# Altium PCB ISL6236A_DEMO_V1I1.PcbDoc
Units mm, origin at the board's own origin, x right, y up, seen from the top; angles counter-clockwise.
Board outline 50 x 50 mm, 6 copper layers (L1, L2, L3, L4, L5, L6), stack 0.816 mm thick; 41 components, 26 nets, 119 pads, 102 vias.
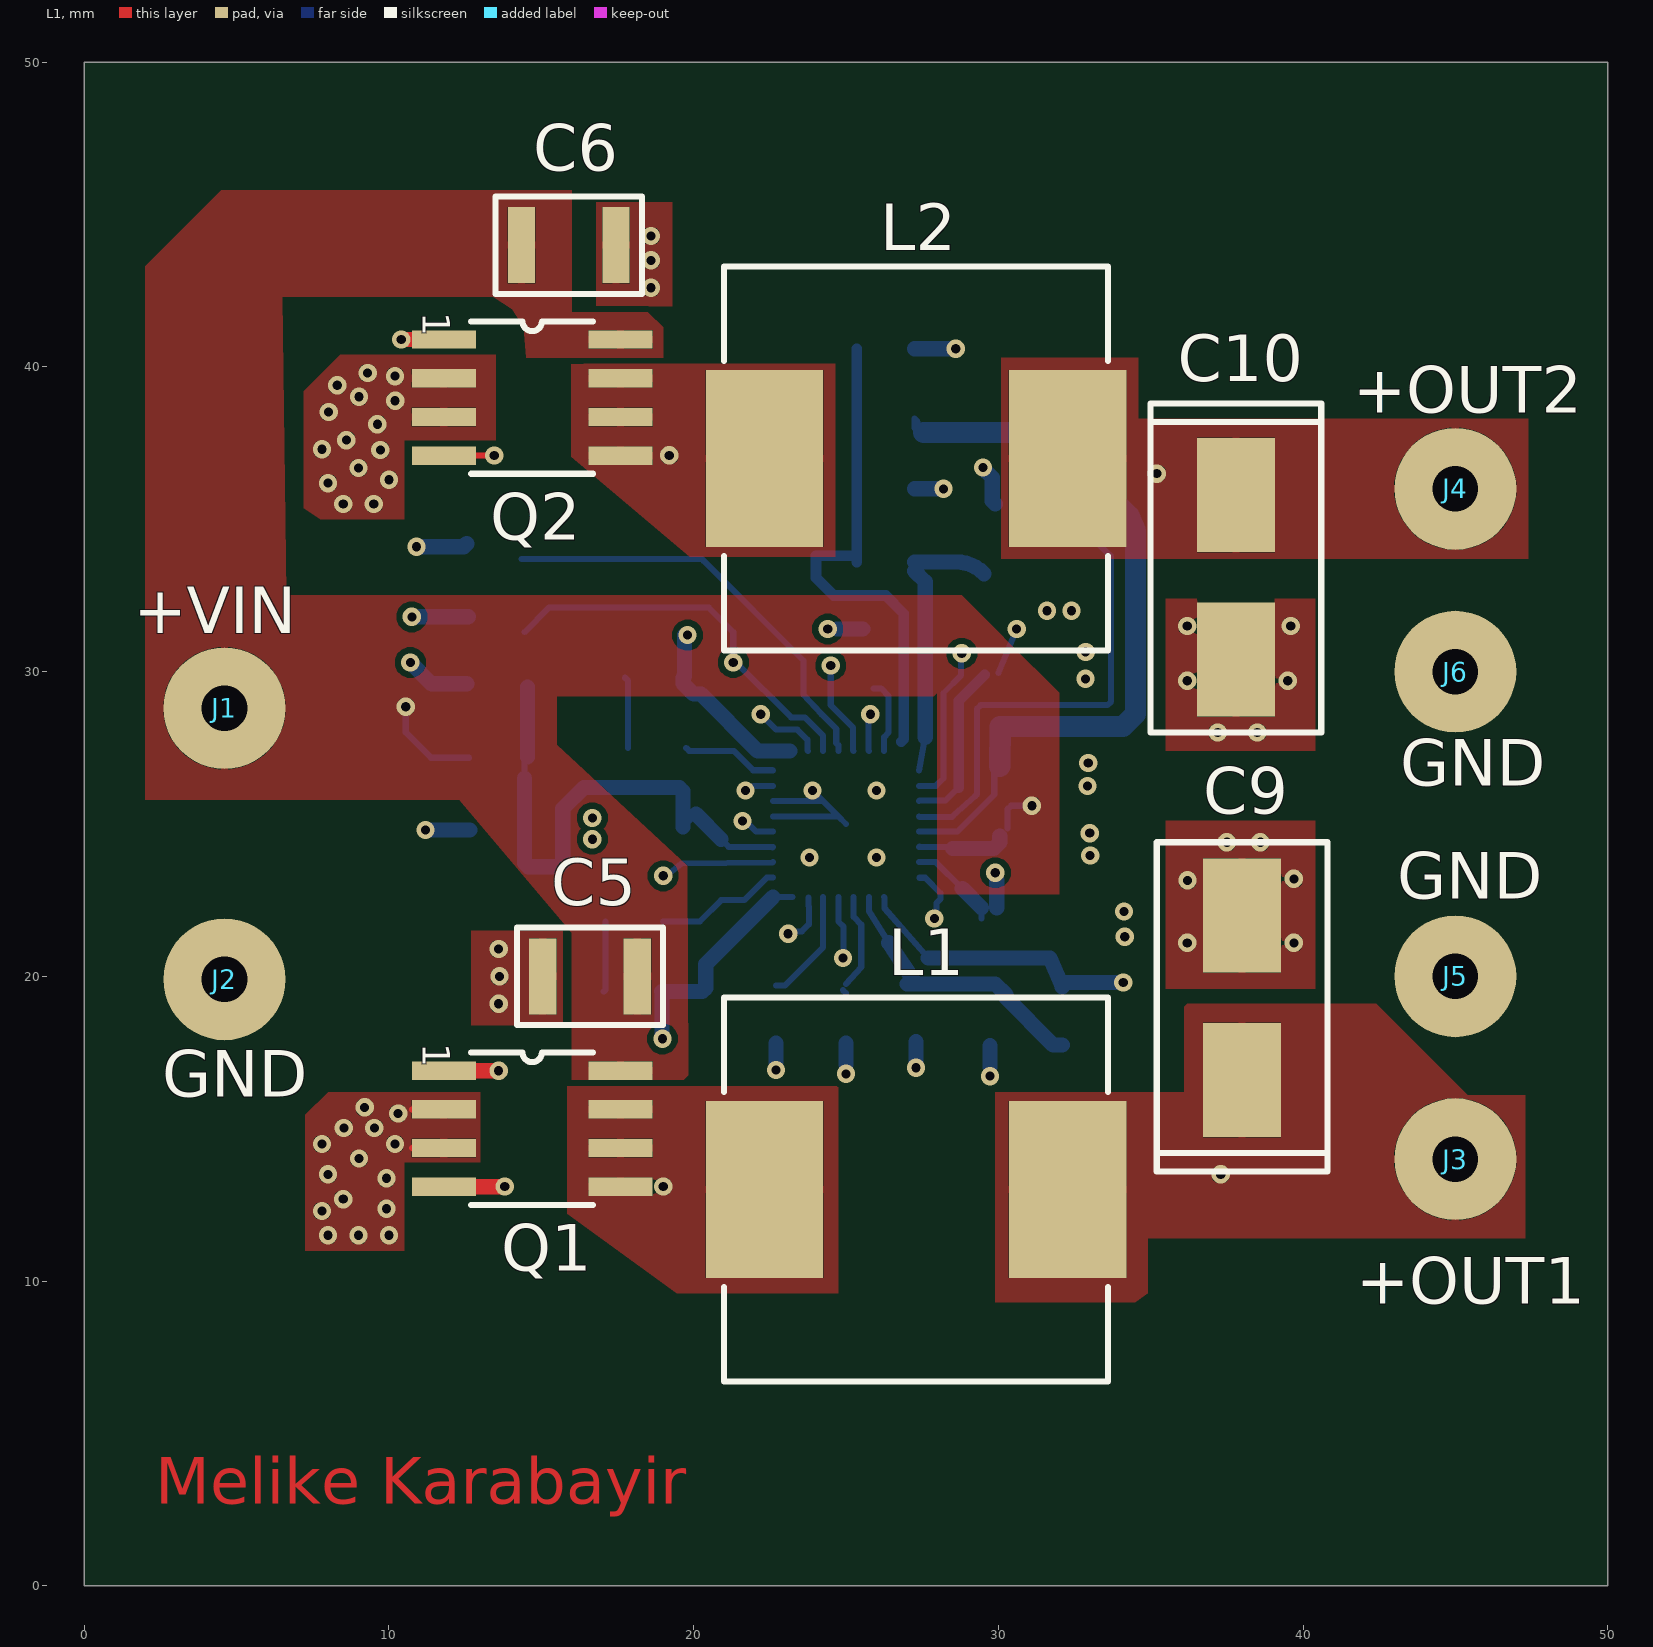
[diagram p0: L1 view]
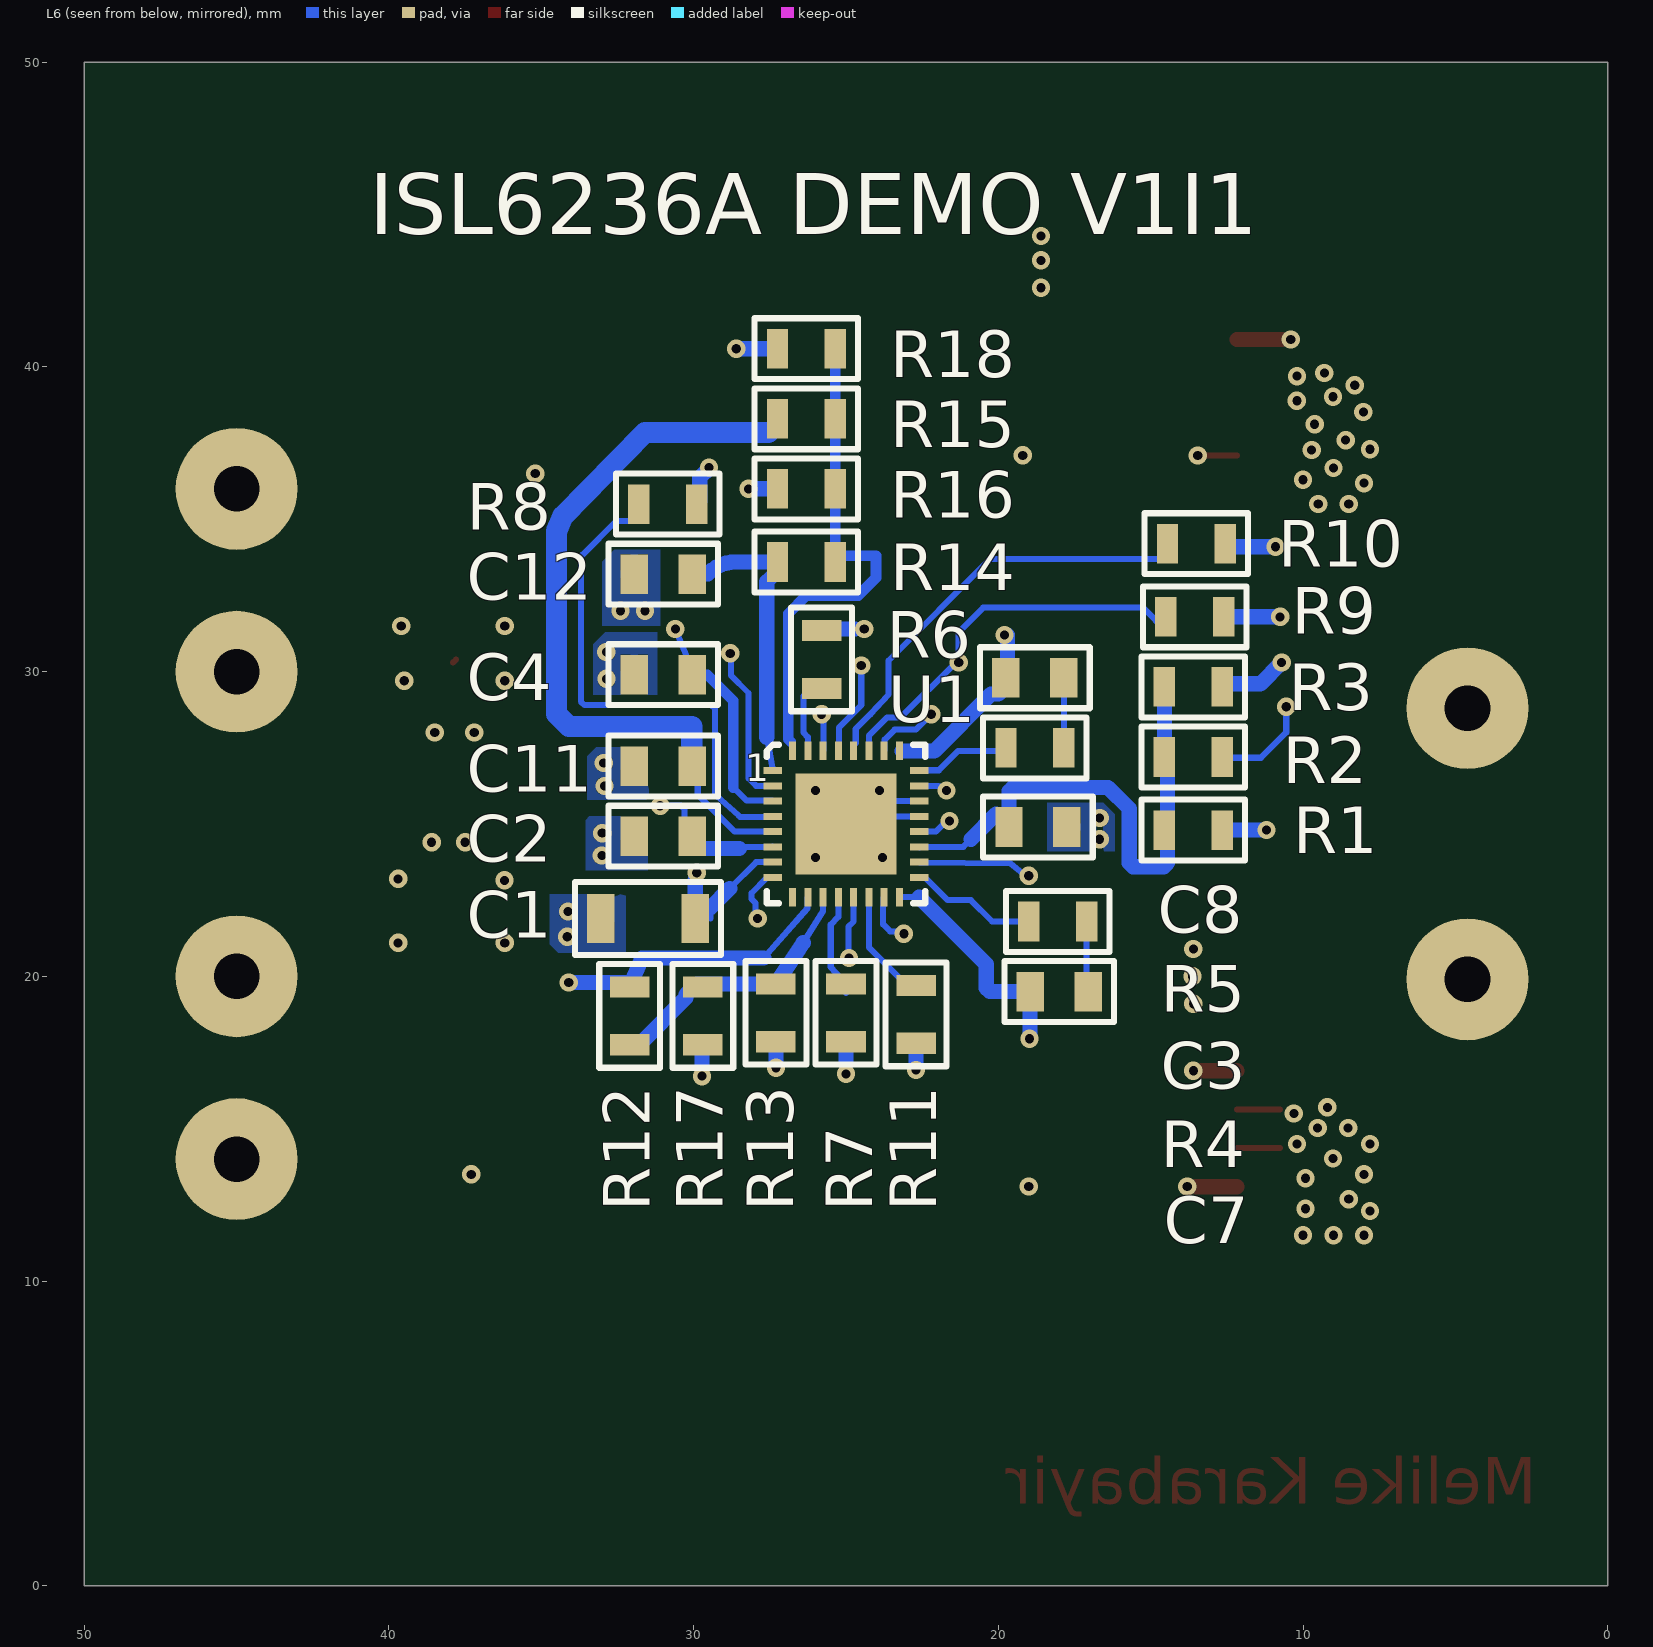
[diagram p1: L6 view, seen from below]
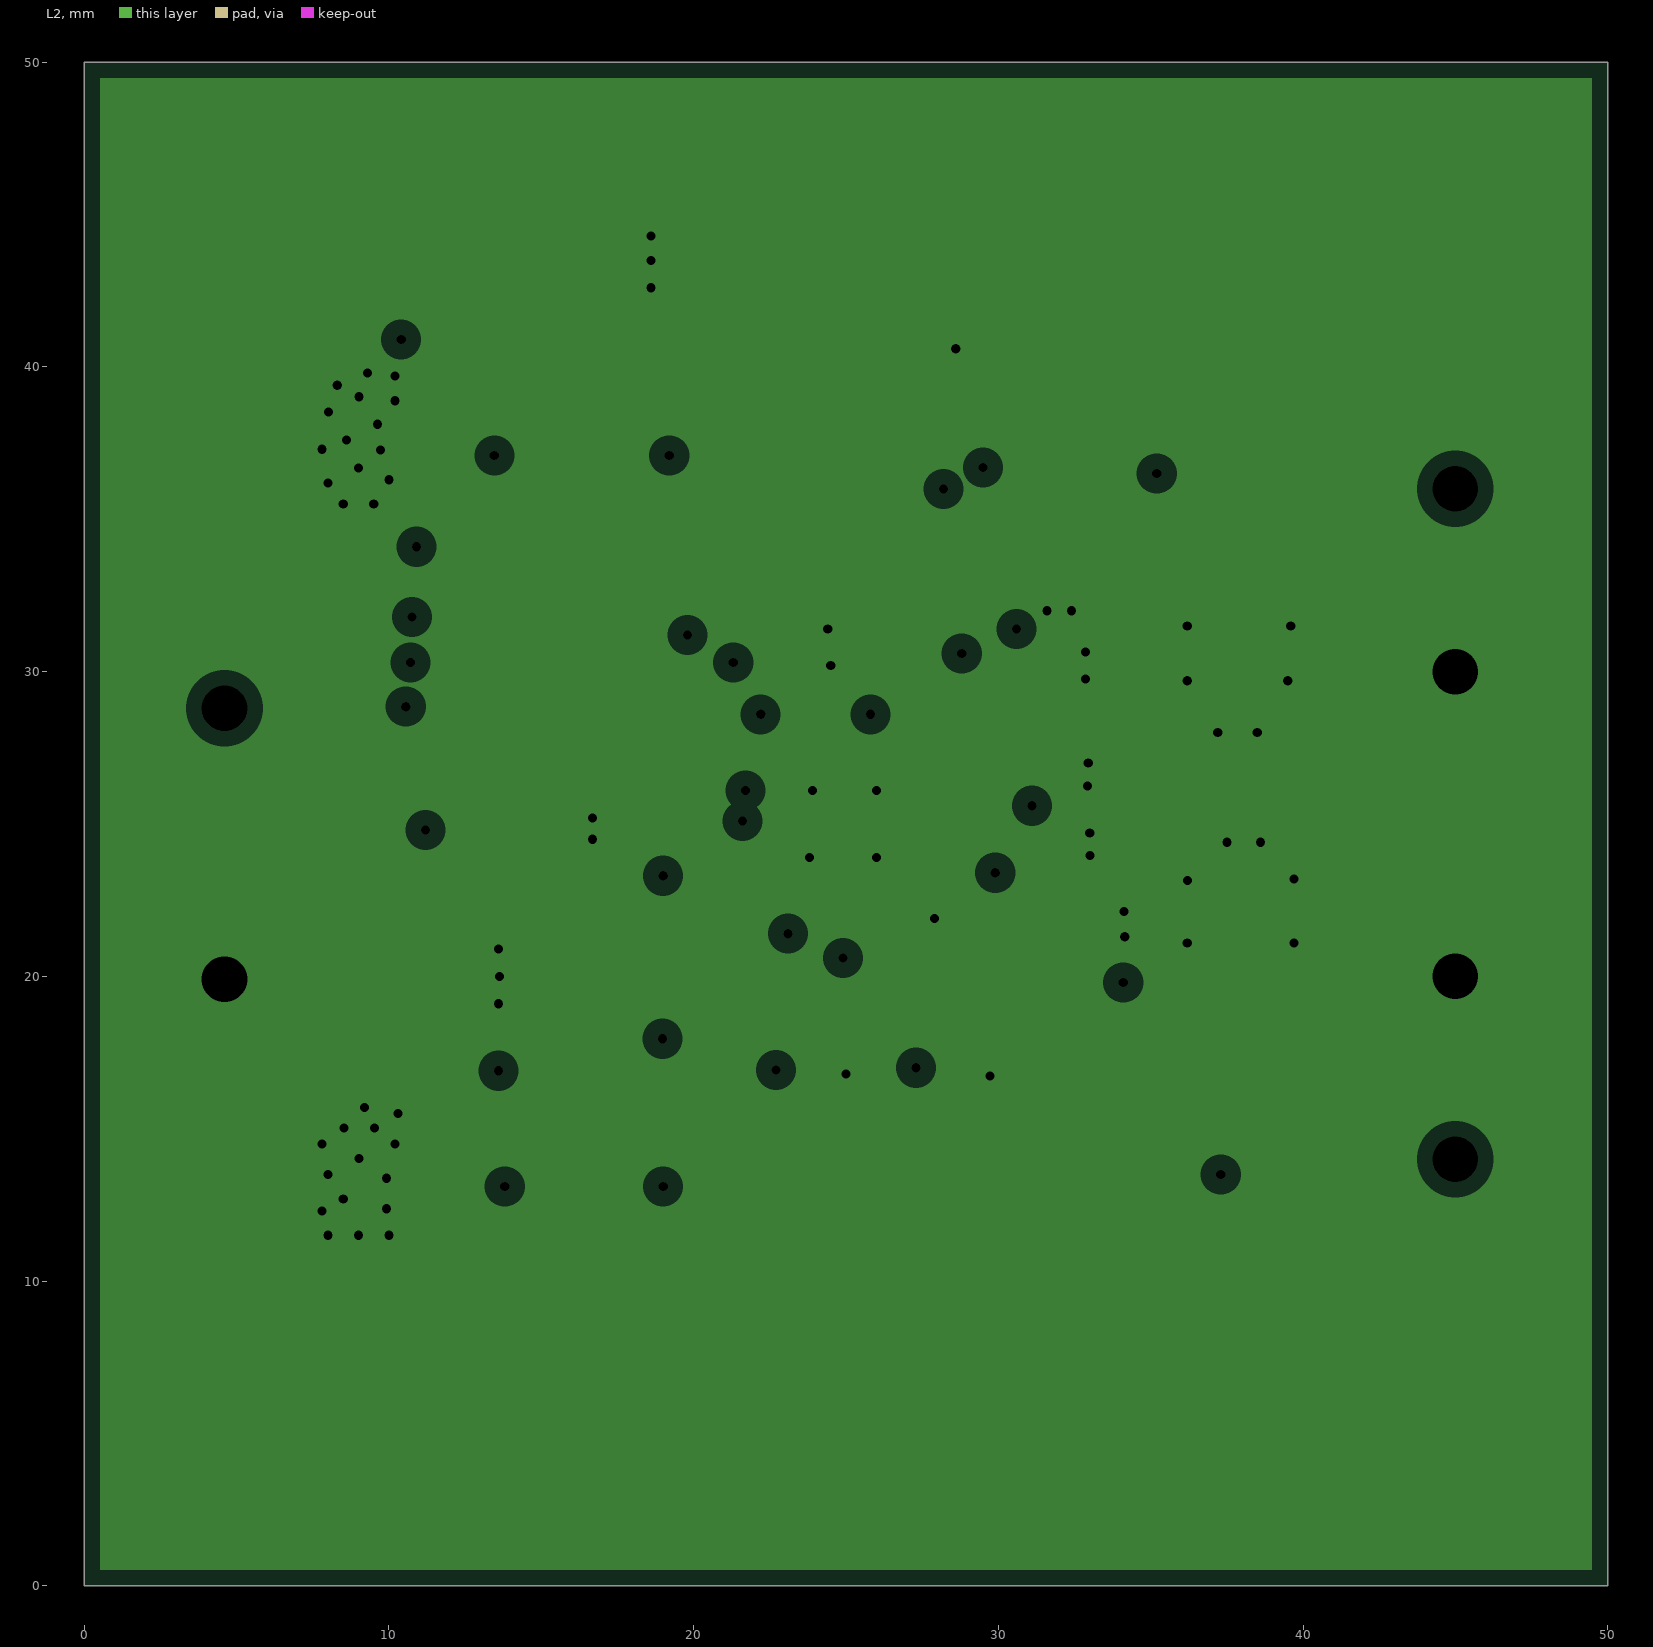
[diagram p2: L2, clearances drawn from the general rule]
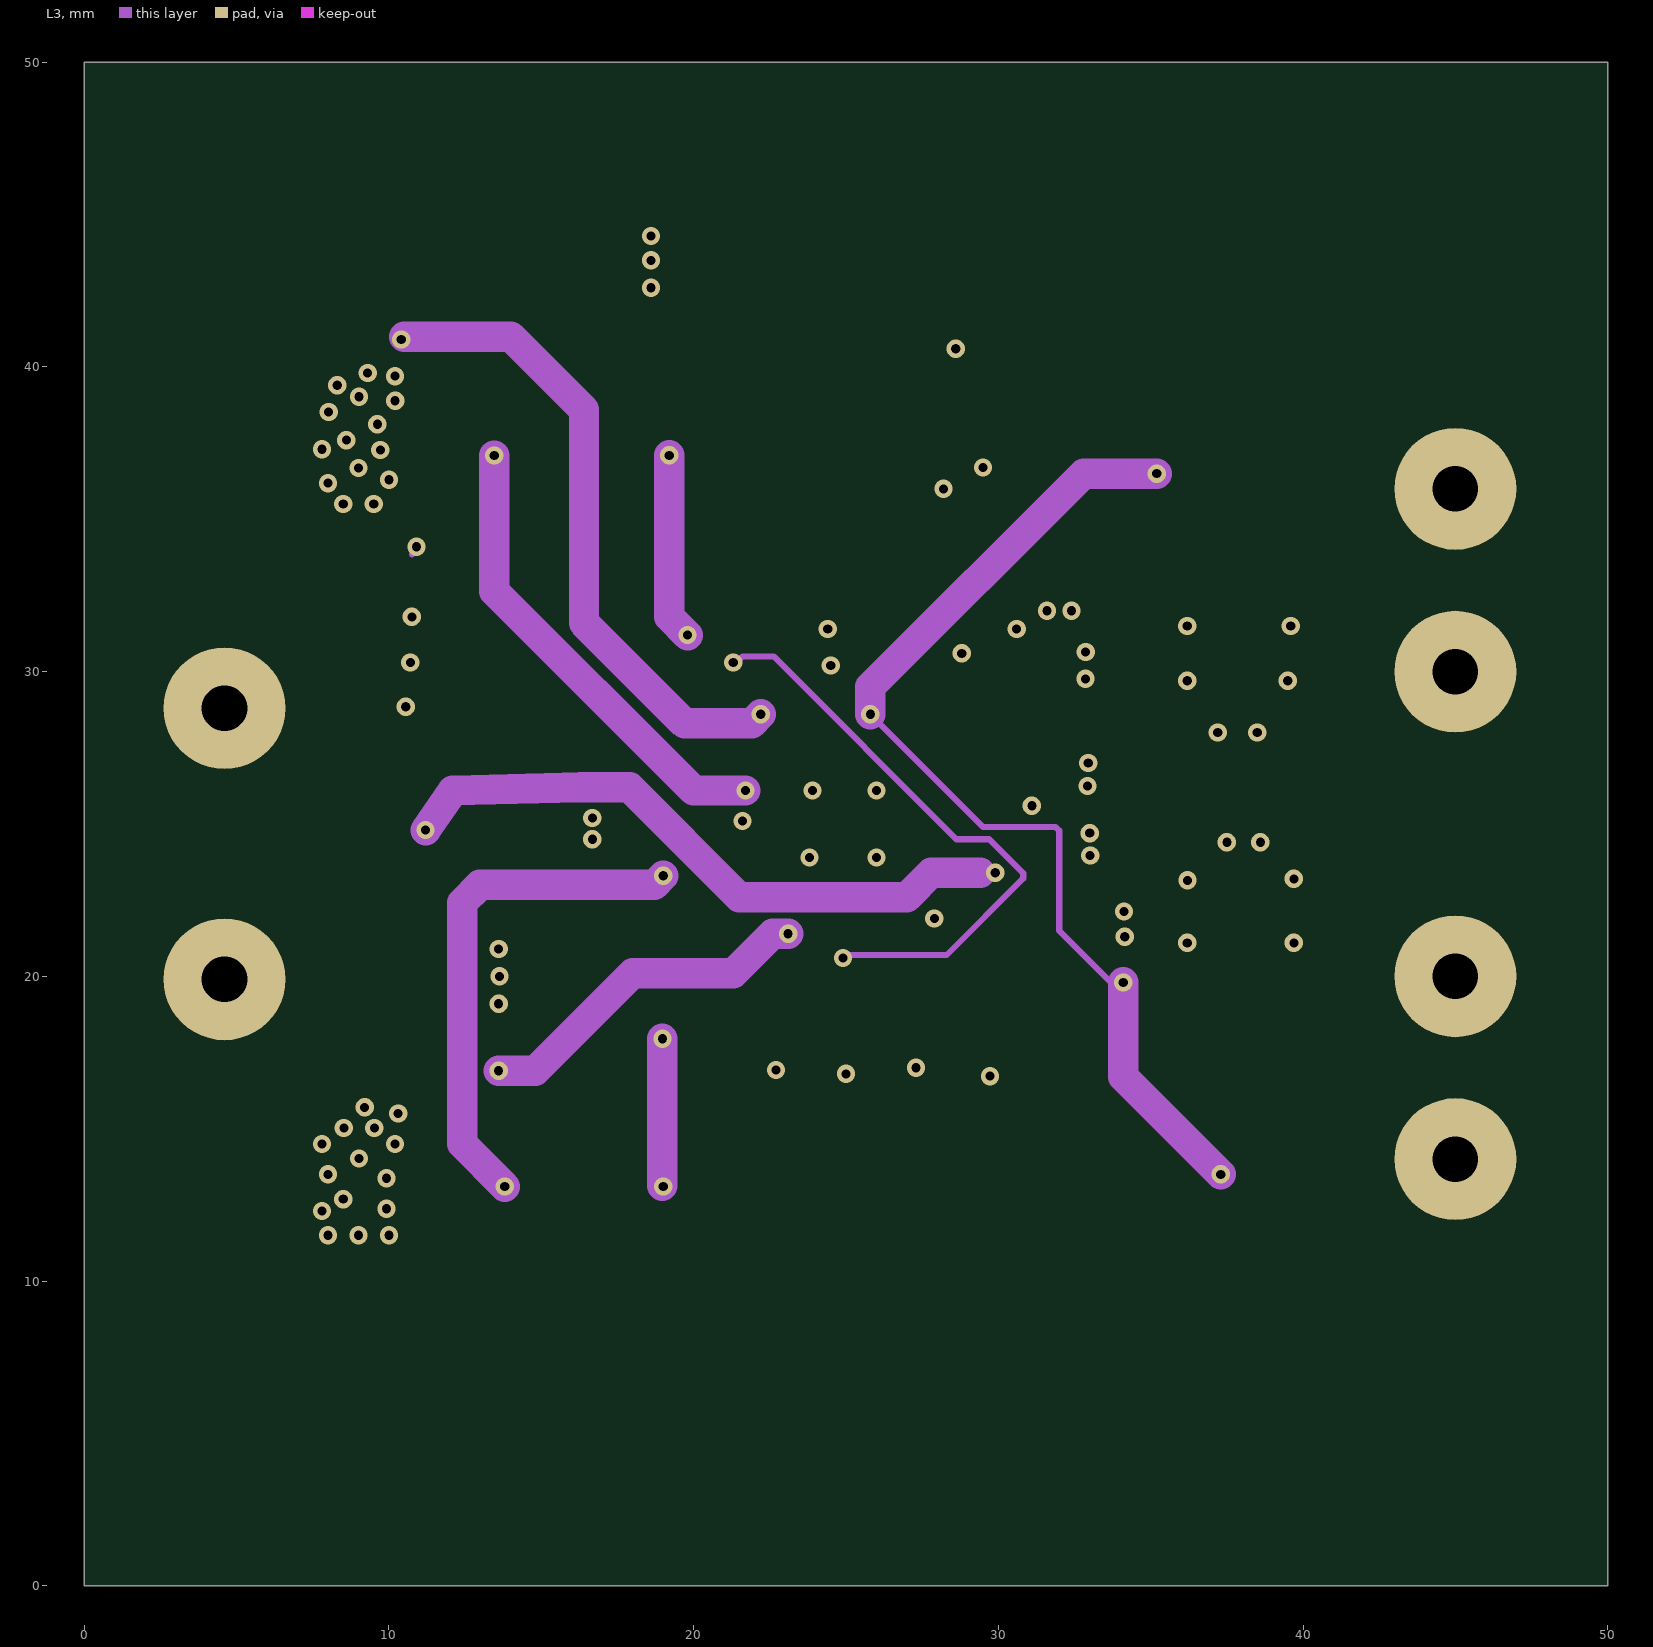
[diagram p3: L3]
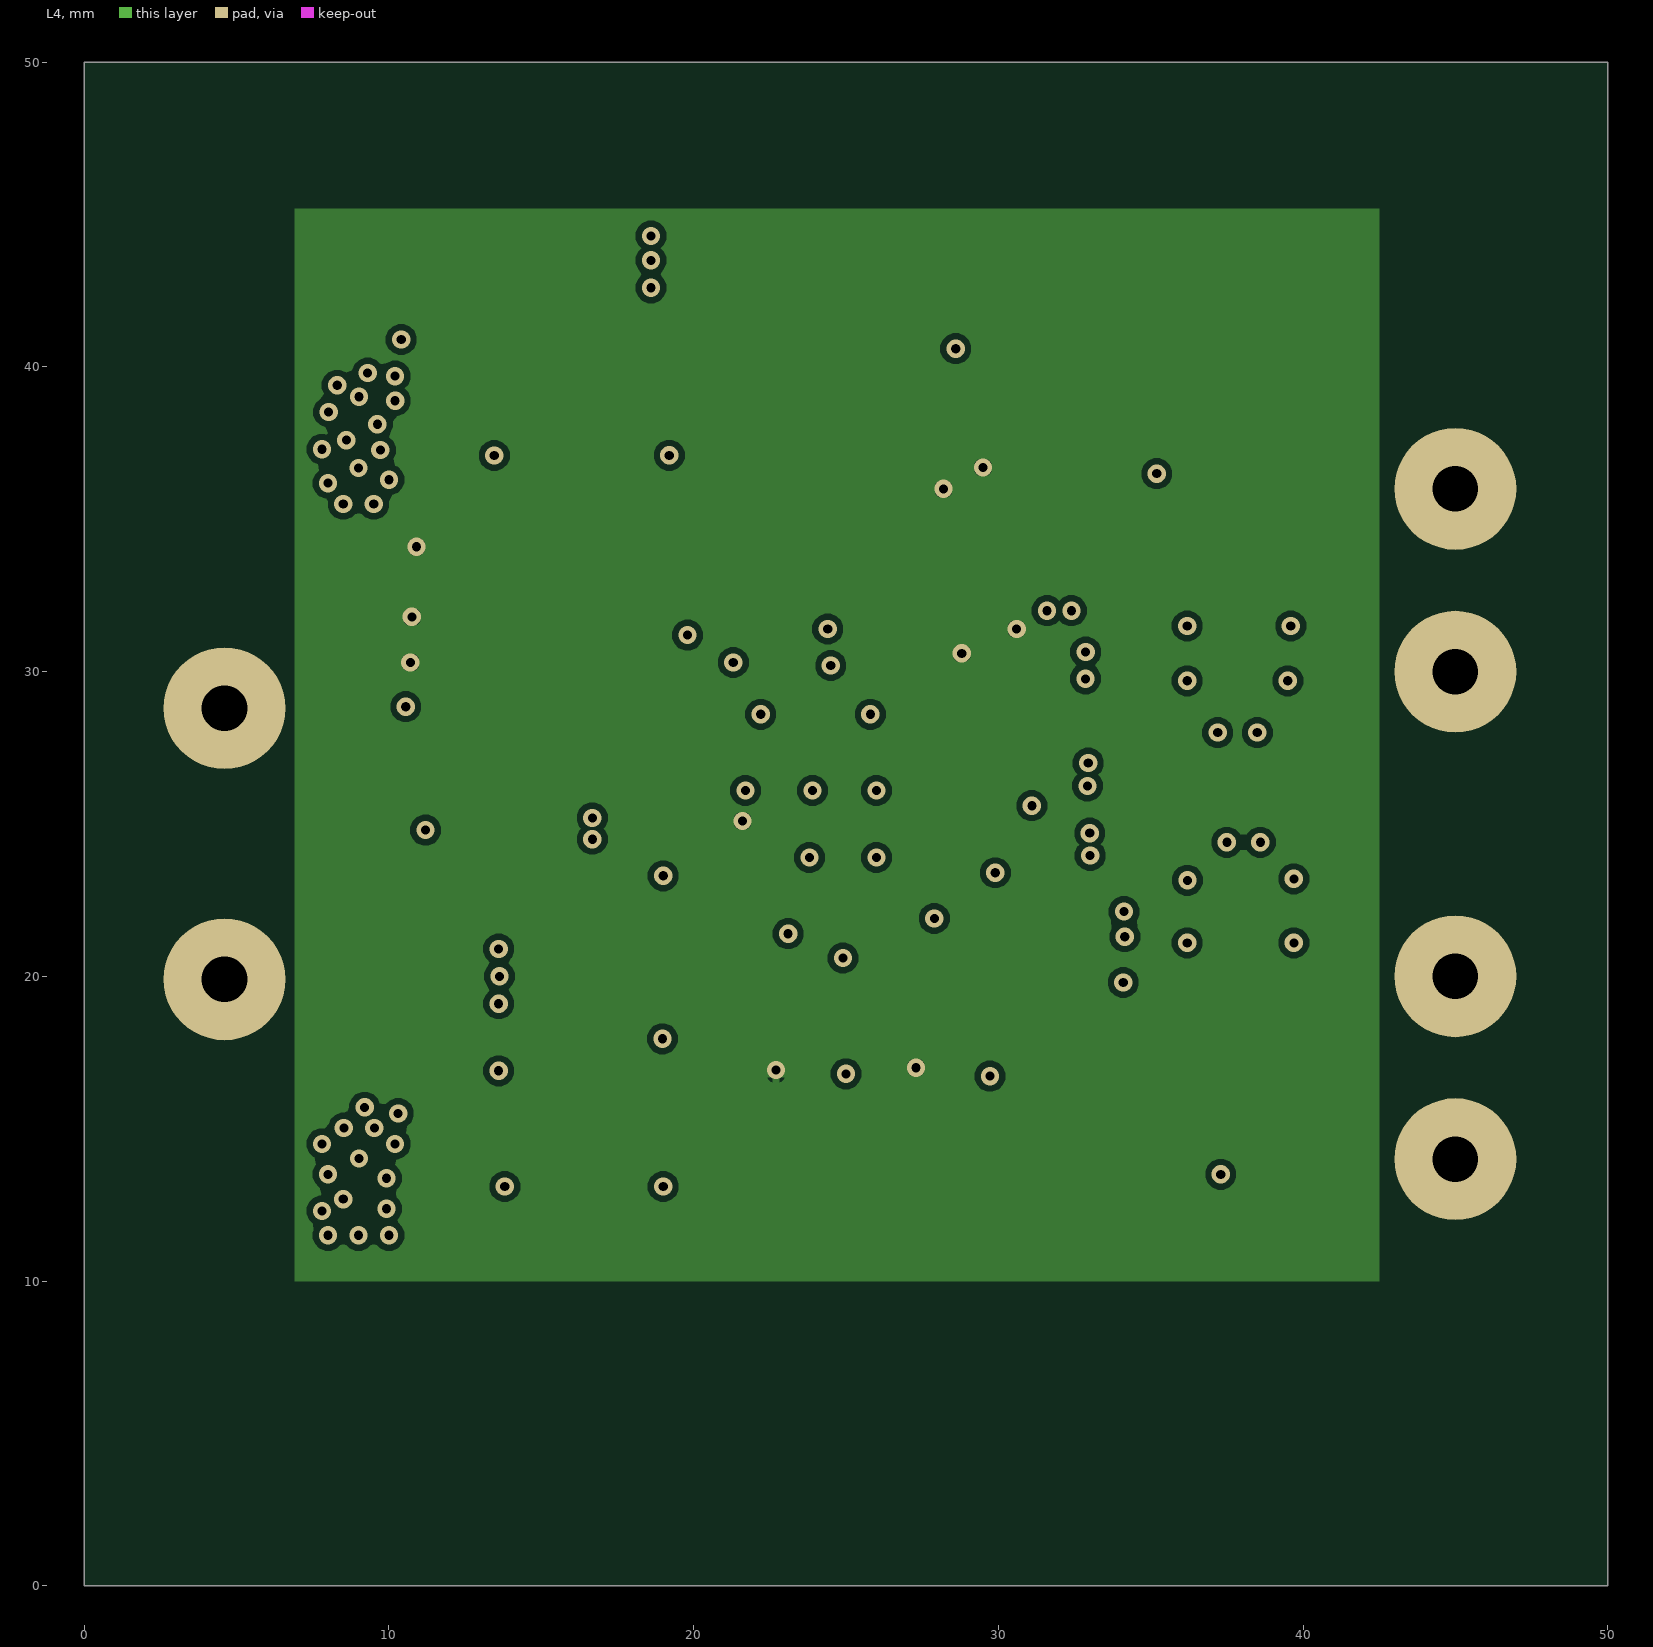
[diagram p4: L4]
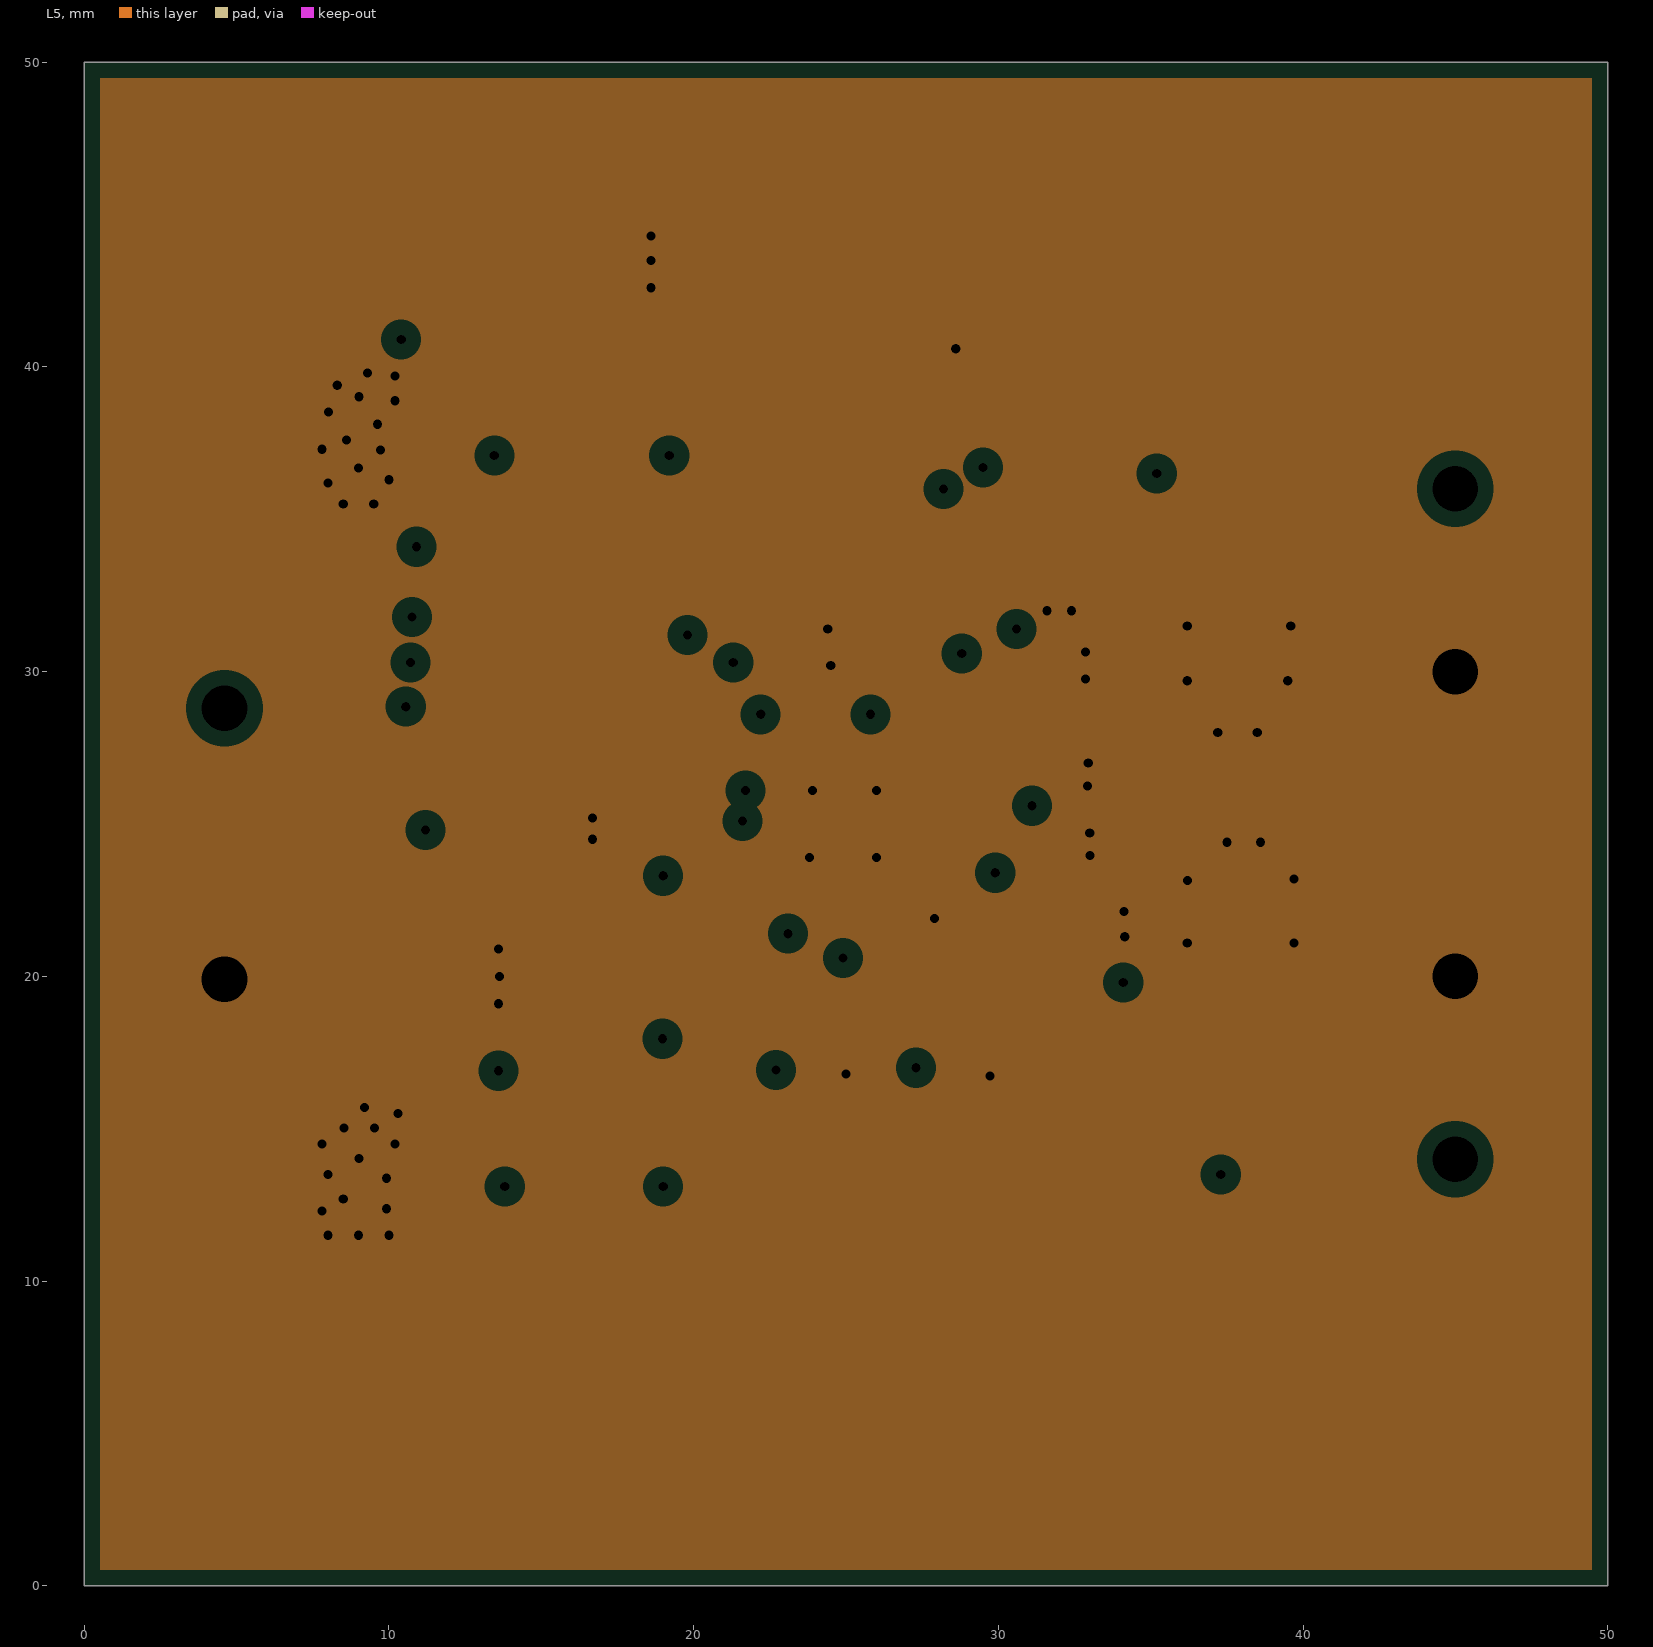
[diagram p5: L5, clearances drawn from the general rule]

## Layer stack, top to bottom
Top Solder: solder mask 0.0102, Solder Resist, Dk 3.5
L1: signal copper 0.0356
Dielectric 2: prepreg 0.0711, PP-006, Dk 4.1
L2: plane copper 0.035, net GND
Dielectric 3: prepreg 0.0711, PP-006, Dk 4.1
L3: signal copper 0.035
Dielectric 4: prepreg 0.0711, PP-006, Dk 4.1
L4: signal copper 0.035
Dielectric 5: prepreg 0.0711, PP-006, Dk 4.1
L5: plane copper 0.035, net GND
Dielectric 1: dielectric 0.32, FR-4, Dk 4.8
L6: signal copper 0.0356
Bottom Solder: solder mask 0.0102, Solder Resist, Dk 3.5

## Board outline
50,0 50,50 0,50 0,0 25,0

## Design rules (kind name [scope] priority, off if disabled: settings)
Clearance [All] p1: gap=0.2 ignorepadtopadclearanceinfootprint=FALSE
ComponentClearance [All] p1: gap=0.099 collisioncheckmode=3 verticalgap=0.099 showdistances=FALSE
MinimumSolderMaskSliver [All] p1: minsoldermaskwidth=0.1
PlaneClearance [All] p1: clearance=0.508
PlaneConnect [All] p1: pad.planeconnectstyle=Relief pad.reliefexpansion=0.508 pad.reliefentries=4 pad.reliefconductorwidth=1 pad.reliefairgap=0.5 via.planeconnectstyle=Direct via.reliefexpansion=0.508 via.reliefentries=4 via.reliefconductorwidth=0.254 via.reliefairgap=0.254
PolygonConnect [All vs InNet('No Net')] p1: connectstyle=Direct reliefconductorwidth=0.254 reliefentries=4 polygonreliefangle="90 Angle" airgapwidth=0.254
RoutingVias [All] p1: holewidth=0.3 width=0.8 viastyle="Through Hole" minholewidth=0.3 minwidth=0.8 maxholewidth=0.3 maxwidth=0.8
SilkToSolderMaskClearance [IsPad] p1: minsilkscreentomaskgap=0.1 clearancetoexposedcopper=TRUE
SolderMaskExpansion [All] p1: expansion=0.102 istentingtop=FALSE
Width [All] p1: maxlimit=10 minlimit=0.2 preferedwidth=0.2
25 further rules are at their usual default settings.

## Components (designator, comment, footprint, x,y, rotation, side; value= is the part's Value field where it differs from the comment)
C1 "4.7uF" C1206 31.5,21.9 r0 bottom
C2 "1uF, 50V" C0805 31,24.6 r0 bottom
C3 "1uF" C0805 18.7,24.9 r0 bottom
C4 "1uF" C0805 31,29.9 r0 bottom
C5 "10uF" C1210 16.6,20 r0 top
C6 "10uF" C1210 15.9,44 r180 top
C7 "0.1 uF" C0805 18,19.5 r180 bottom
C8 "0.22uF" C0805 18.8,29.8 r0 bottom value=220nF
C9 "330uF,10V" 7343-43 38,19.3 r90 top
C10 "330uF,10V" 7343-43 37.8,33.1 r270 top
C11 "0.01uF" C0805 31,26.9 r0 bottom value=10nF
C12 "0.1 uF" C0805 31,33.2 r0 bottom
J1 "4MMx1.5MM" PAD_WITH_HOLE_4MMx1MM5 4.6,28.8 r0 top
J2 "4MMx1.5MM" PAD_WITH_HOLE_4MMx1MM5 4.6,19.9 r0 top
J3 "4MMx1.5MM" PAD_WITH_HOLE_4MMx1MM5 45,14 r0 top
J4 "4MMx1.5MM" PAD_WITH_HOLE_4MMx1MM5 45,36 r0 top
J5 "4MMx1.5MM" PAD_WITH_HOLE_4MMx1MM5 45,20 r0 top
J6 "4MMx1.5MM" PAD_WITH_HOLE_4MMx1MM5 45,30 r0 top
L1 "3u3, DR125-3R3-R" DR125 27.3,13 r180 top
L2 "2u2, DR125-2R2-R" DR125 27.3,37 r0 top
Q1 "SI4816BDY-T1-E3" SO-8 14.7,15 r0 top
Q2 "SI4816BDY-T1-E3" SO-8 14.7,38.995 r0 top
R1 "0R" R0805 13.6,24.8 r180 bottom
R2 "0R" R0805 13.6,27.2 r0 bottom
R3 "10R" R0805 13.6,29.5 r180 bottom
R4 "1R" R0805 18.05,21.8 r0 bottom
R5 "1R" R0805 18.8,27.5 r180 bottom
R6 "200k" R0805 25.8,30.4 r90 bottom
R7 "200k" R0805 25,18.8 r90 bottom
R8 "10K" R0805 30.85,35.5 r180 bottom
R9 "200k" R0805 13.55,31.8 r0 bottom
R10 "200k" R0805 13.5,34.2 r180 bottom
R11 "10K" R0805 22.7,18.75 r270 bottom
R12 "DNF" R0805 32.1,18.7 r90 bottom
R13 "0R" R0805 27.3,18.8 r270 bottom
R14 "DNF" R0805 26.3,33.6 r0 bottom
R15 "0R" R0805 26.3,38.3 r0 bottom
R16 "DNF" R0805 26.3,36 r0 bottom
R17 "DNF" R0805 29.7,18.7 r90 bottom
R18 "DNF" R0805 26.3,40.6 r180 bottom
U1 "ISL6236AIRZ" L32.5x5B 25,25 r180 bottom

## Footprints (in the part's own frame and the unit in brackets; to place one, negate y for a bottom-side part, rotate by r counter-clockwise, add the part's x,y. Pads: shape width x height; smd on the part's side, far side on the other; paste and mask are expansions set on the pad)
7343-43 [mm]
  rect 3.75x2.55 smd: 1(-2.7,0) 2(2.7,0)
  silkscreen extent -5.7,-2.8 5.1,2.8
C0805 [mm]
  rect 0.9x1.3 smd: 1(-0.95,0) 2(0.95,0)
  silkscreen extent -1.8,-1 1.8,1
C1206 [mm]
  rect 0.9x1.6 smd: 1(-1.55,0) 2(1.55,0)
  silkscreen extent -2.4,-1.2 2.4,1.2
C1210 [mm]
  rect 0.9x2.5 smd: 1(-1.55,0) 2(1.55,0)
  silkscreen extent -2.4,-1.6 2.4,1.6
DR125 [mm]
  rect 3.85x5.8 smd: 1(-4.975,0) 2(4.975,0)
  silkscreen extent -6.3,-6.3 6.3,6.3
L32.5x5B [mm]
  rect 0.6x0.23 smd mask+0.051: 1(-2.4,1.75) 2(-2.4,1.25) 3(-2.4,0.75) 4(-2.4,0.25) 5(-2.4,-0.25) 6(-2.4,-0.75) 7(-2.4,-1.25) 8(-2.4,-1.75) 17(2.4,-1.75) 18(2.4,-1.25) 19(2.4,-0.75) 20(2.4,-0.25) 21(2.4,0.25) 22(2.4,0.75) 23(2.4,1.25) 24(2.4,1.75)
  rect 0.23x0.6 smd mask+0.051: 9(-1.75,-2.4) 10(-1.25,-2.4) 11(-0.75,-2.4) 12(-0.25,-2.4) 13(0.25,-2.4) 14(0.75,-2.4) 15(1.25,-2.4) 16(1.75,-2.4) 25(1.75,2.4) 26(1.25,2.4) 27(0.75,2.4) 28(0.25,2.4) 29(-0.25,2.4) 30(-0.75,2.4) 31(-1.25,2.4) 32(-1.75,2.4)
  rect 3.3x3.3 smd mask+0.051: 33(0,0)
  silkscreen extent -2.6,-2.6 2.6,2.6
PAD_WITH_HOLE_4MMx1MM5 [mm]
  round 4 hole 1.5: 1(0,0)
R0805 [mm]
  rect 0.7x1.3 smd: 1(-0.95,0) 2(0.95,0)
  silkscreen extent -1.7,-1 1.7,1
SO-8 [mm]
  rect 2.1x0.6 smd: 1(-2.9,1.905) 2(-2.9,0.635) 3(-2.9,-0.635) 4(-2.9,-1.905) 5(2.9,-1.905) 6(2.9,-0.635) 7(2.9,0.635) 8(2.9,1.905)
  silkscreen extent -2,-2.5 2,2.5

## Part data
C1: library part C3216X5R1H475K160AB, "C Series 1206 4.7 uF 50 V ±10 % Tolerance X5R SMT Multilayer Ceramic Capacitor", Manufacturer=TDK, Supplier Part Number=445-5994-2-ND, Category="Ceramic Capacitors", ComponentLink1Description=https://datasheet.ciiva.com/24216/c3216x5r1h475k160ab-265269-24216325.pdf?src-supplier=Mouser, ComponentLink1URL=https://datasheet.ciiva.com/24216/c3216x5r1h475k160ab-265269-24216325.pdf?src-supplier=Mouser, ComponentLink2Description=https://datasheet.ciiva.com/6286/tdkmlcccaprange-6286230.pdf?src-supplier=Digi-Key, ComponentLink2URL=https://datasheet.ciiva.com/6286/tdkmlcccaprange-6286230.pdf?src-supplier=Digi-Key, ComponentLink3Description=https://datasheet.ciiva.com/6286/tdkmlcccaprange-6286233.pdf?src-supplier=Digi-Key, ComponentLink3URL=https://datasheet.ciiva.com/6286/tdkmlcccaprange-6286233.pdf?src-supplier=Digi-Key, ComponentLink4Description=https://datasheet.ciiva.com/6286/tdkmlcccaprange-6286236.pdf?src-supplier=Digi-Key, ComponentLink4URL=https://datasheet.ciiva.com/6286/tdkmlcccaprange-6286236.pdf?src-supplier=Digi-Key, Manufacturer Part Number=C3216X5R1H475K160AB, Pricing="2000=0,22725, 4000=0,2121, 10000=0,20453, 14000=0,2015, 50000=0,19316 (USD)", RoHS=Yes, Stock=64000, Supplier=Digi-Key
C2: library part C0805X105K5RACAUTO, "Ceramic Capacitor, Multilayer, Ceramic, 50V, 10% +Tol, 10% -Tol, X7R, 15% TC, 1uF, Surface Mount, 0805", Manufacturer=KEMET, Supplier Part Number=399-C0805X105K5RACAUTOCT-ND, Category="Ceramic Capacitors", Manufacturer Part Number=C0805X105K5RACAUTO, Pricing="1=0,97, 10=0,736, 50=0,6118, 100=0,5268, 500=0,4078, 1000=0,35117 (USD)", RoHS=No, Stock=697, Supplier=Digi-Key
C3 C4: library part 08053D105KAT2A\3K, "Cap Cer 1UF 25V X5R 0805", Manufacturer="Kyocera AVX", Supplier Part Number=478-KGM21AR51E105KUCT-ND, Category="Ceramic Capacitors", Manufacturer Part Number=08053D105KAT2A\3K, Pricing="1=0,41, 10=0,288, 50=0,2016, 100=0,1728, 500=0,1296, 1000=0,10944 (USD)", RoHS=No, Stock=27624, Supplier=Digi-Key
C5 C6: library part C1210C106K5PAC7210, "Cap Ceramic 10uF 50V X5R 10% Pad SMD 1210 85C T/R", Manufacturer=KEMET, Supplier Part Number=399-C1210C106K5PAC7210CT-ND, Category="Ceramic Capacitors", Manufacturer Part Number=C1210C106K5PAC7210, Pricing="1=0,9, 10=0,686, 50=0,5702, 100=0,491, 500=0,38016, 1000=0,32736 (USD)", RoHS=Yes, Stock=38264, Supplier=Digi-Key
C7 C12: library part C0805C104K5RAC7800, "Multilayer Ceramic Capacitor, 0.1 uF, 50 V, ± 10%, X7R, 0805 [2012 Metric]", Manufacturer=KEMET, Supplier Part Number=399-C0805C104K5RAC7800DKR-ND, ComponentLink1Description=https://datasheet.octopart.com/C0805C104K5RACTU-KEMET-datasheet-101576148.pdf?src-supplier=Farnell, ComponentLink1URL=https://datasheet.octopart.com/C0805C104K5RACTU-KEMET-datasheet-101576148.pdf?src-supplier=Farnell, ComponentLink2Description=https://datasheet.octopart.com/C0805C104K5RAC-TU-Kemet-datasheet-32036385.pdf?src-supplier=Element14, ComponentLink2URL=https://datasheet.octopart.com/C0805C104K5RAC-TU-Kemet-datasheet-32036385.pdf?src-supplier=Element14, ComponentLink3Description=https://datasheet.octopart.com/C0805C104K5RAC-TU-Kemet-datasheet-5313890.pdf?src-supplier=Newark, ComponentLink3URL=https://datasheet.octopart.com/C0805C104K5RAC-TU-Kemet-datasheet-5313890.pdf?src-supplier=Newark, ComponentLink4Description=https://datasheet.octopart.com/C0805C104K5RACTU-KEMET-datasheet-164512540.pdf?src-supplier=TME, ComponentLink4URL=https://datasheet.octopart.com/C0805C104K5RACTU-KEMET-datasheet-164512540.pdf?src-supplier=TME, Manufacturer Part Number=C0805C104K5RAC7800, Pricing="1=0,13, 10=0,092, 50=0,052, 100=0,0431, 500=0,03024, 1000=0,02504 (USD)", RoHS=No, Stock=2423632, Supplier=Digi-Key
C8: library part C0805C224K5RACTU, "Multilayer Ceramic Capacitor, 0.22 uF, 50 V, ± 10%, X7R, 0805 [2012 Metric]", Case Code (Metric)=2012, Case Code (Imperial)=0805, Dielectric=X7R, Dielectric Material=Ceramic, Manufacturer=KEMET, Max Operating Temperature=125°C, Min Operating Temperature=-55°C, Package Quantity=4000, Supplier Part Number=399-C0805C224K5RACTUCT-ND, Tolerance=10%, Voltage=50V, Case/Package=0805, Category="Ceramic Capacitors", ComponentLink1Description=https://datasheet.ciiva.com/7842/kem-c1002-x7r-smd-7842582.pdf?src-supplier=Element14, ComponentLink1URL=https://datasheet.ciiva.com/7842/kem-c1002-x7r-smd-7842582.pdf?src-supplier=Element14, ComponentLink2Description=https://datasheet.ciiva.com/28682/1851736-28682316.pdf?src-supplier=Element14, ComponentLink2URL=https://datasheet.ciiva.com/28682/1851736-28682316.pdf?src-supplier=Element14, ComponentLink3Description=https://datasheet.ciiva.com/14589/70095383-14589519.pdf?src-supplier=Allied+Electronics, ComponentLink3URL=https://datasheet.ciiva.com/14589/70095383-14589519.pdf?src-supplier=Allied+Electronics, ComponentLink4Description=https://datasheet.ciiva.com/14603/70095383-14603247.pdf?src-supplier=Allied+Electronics, ComponentLink4URL=https://datasheet.ciiva.com/14603/70095383-14603247.pdf?src-supplier=Allied+Electronics, Construction=Flat, Depth=1.25mm, Dissipation Factor=2.5%, Height=1.1mm, Lead Pitch=0.75mm, Length=2mm, Manufacturer Part Number=C0805C224K5RACTU, Mounting Technology="Surface Mount,PCB", Packaging="Tape and Reel", Pricing="1=0,15, 10=0,106, 50=0,06, 100=0,0497, 500=0,03484, 1000=0,02885 (USD)", Radiation Hardening=No, Reach SVHC Compliant=No, RoHS=Yes, RoHS Compliant=Yes, Series="SMD Comm X7R", Stock=1003081, Supplier=Digi-Key, Termination=SMD/SMT, Voltage Rating=50V, Voltage Rating (DC)=50V, Width=1.2mm
C9 C10: library part T530X337M010ATE004, "Cap Tant Solid 330uF 10V X CASE 20% (7.3 X 4.3 X 4mm) SMD 7343-43 0.004 Ohm 125 C T/R", Manufacturer=KEMET, Supplier Part Number=399-10378-1-ND, Category="Polymer Capacitors", ComponentLink1Description=https://datasheet.ciiva.com/11794/0900766b80deaa91-11794477.pdf?src-supplier=Rs, ComponentLink1URL=https://datasheet.ciiva.com/11794/0900766b80deaa91-11794477.pdf?src-supplier=Rs, ComponentLink2Description=https://datasheet.ciiva.com/14593/70096008-14593753.pdf?src-supplier=Allied+Electronics, ComponentLink2URL=https://datasheet.ciiva.com/14593/70096008-14593753.pdf?src-supplier=Allied+Electronics, Manufacturer Part Number=T530X337M010ATE004, Pricing="1=7,14, 10=6,35, 50=5,5562, 100=5,0799 (USD)", RoHS=Yes, Stock=3821, Supplier=Digi-Key
C11: library part C0805F103K5RACTU, "0805 C 10nF Ceramic Multilayer Capacitor; 50 VDC; +125degC; X7R Dielec; +/-10%", Case Code (Metric)=2012, Case Code (Imperial)=0805, Dielectric=X7R, Manufacturer=KEMET, Max Operating Temperature=125°C, Min Operating Temperature=-55°C, Package Quantity=1, Supplier Part Number=399-C0805F103K5RAC7800CT-ND, Tolerance=10%, Voltage Rating=50V, Case/Package=0805, Category="Ceramic Capacitors", ComponentLink1Description=https://datasheet.ciiva.com/146/docfinderpartnumber-c0805f103k5ractu-146278.pdf?src-supplier=Digi-Key, ComponentLink1URL=https://datasheet.ciiva.com/146/docfinderpartnumber-c0805f103k5ractu-146278.pdf?src-supplier=Digi-Key, ComponentLink2Description=https://datasheet.ciiva.com/7842/48829-7842407.pdf?src-supplier=Element14, ComponentLink2URL=https://datasheet.ciiva.com/7842/48829-7842407.pdf?src-supplier=Element14, ComponentLink3Description=https://datasheet.ciiva.com/7842/48829-7842408.pdf?src-supplier=Element14, ComponentLink3URL=https://datasheet.ciiva.com/7842/48829-7842408.pdf?src-supplier=Element14, Construction=Flat, Depth=1.25mm, Height=0.9mm, Lead Pitch=0.75mm, Length=2mm, Manufacturer Part Number=C0805F103K5RACTU, Mounting Technology="Surface Mount", Packaging="Cut Tape", Pins=2, Pricing="1=0,33, 10=0,225, 50=0,1502, 100=0,1276, 500=0,09008, 1000=0,07883 (USD)", Reach SVHC Compliant=No, RoHS=Yes, RoHS Compliant=Yes, Series=FO-CAP, Stock=11337, Supplier=Digi-Key, Termination=SMD/SMT, Thickness=0.039inch, Voltage Rating (DC)=50V, Width=0.049inch
J1 J2 J3 J4 J5 J6: library part PAD_WITH_HOLE_4MMx1MM5, "Pad with a hole 4mmx1.5mm"
L1: library part DR125-3R3-R, "Inductor Power Shielded Drum Core 3.3uH 20% 100KHz Ferrite 9.26A 6.3mOhm DCR T/R", Manufacturer="Eaton Cooper", Supplier Part Number=513-1529-2-ND, Category="Fixed Inductors", Manufacturer Part Number=DR125-3R3-R, Pricing="600=0,63625, 1200=0,56555, 3000=0,54788, 6000=0,53021, 15000=0,51253 (USD)", RoHS=Yes, Stock=28200, Supplier=Digi-Key
L2: library part DR125-2R2-R, "Ind Power Shielded Wirewound 2.2uH 20% 100KHz Ferrite 10.9A T/R", Manufacturer="Eaton Cooper", Supplier Part Number=513-1662-2-ND, Category="Fixed Inductors", ComponentLink1Description=https://datasheet.ciiva.com/14667/0900766b8116a153-14667792.pdf?src-supplier=Rs, ComponentLink1URL=https://datasheet.ciiva.com/14667/0900766b8116a153-14667792.pdf?src-supplier=Rs, ComponentLink2Description=https://datasheet.ciiva.com/26926/getdatasheetpartid-571249-26926912.pdf?src-supplier=Verical, ComponentLink2URL=https://datasheet.ciiva.com/26926/getdatasheetpartid-571249-26926912.pdf?src-supplier=Verical, ComponentLink3Description=https://datasheet.ciiva.com/8004/87246-8004874.pdf?src-supplier=Element14, ComponentLink3URL=https://datasheet.ciiva.com/8004/87246-8004874.pdf?src-supplier=Element14, Manufacturer Part Number=DR125-2R2-R, Pricing="600=0,6363, 1200=0,5656, 3000=0,54793, 6000=0,53025, 15000=0,51257 (USD)", RoHS=Yes, Stock=1800, Supplier=Digi-Key
Q1 Q2: "Trans Mosfet N-ch 30V 5.8A/8.2A 8-PIN SOIC N T/r", Manufacturer="Vishay Siliconix", Supplier Part Number=SI4816BDY-T1-E3CT-ND, Category=MOSFETs, ComponentLink1Description=https://datasheet.ciiva.com/15137/getdatasheetpartid-99188-15137841.pdf?src-supplier=Verical, ComponentLink1URL=https://datasheet.ciiva.com/15137/getdatasheetpartid-99188-15137841.pdf?src-supplier=Verical, ComponentLink2Description=https://datasheet.ciiva.com/7710/si4816bd-7710449.pdf?src-supplier=Element14, ComponentLink2URL=https://datasheet.ciiva.com/7710/si4816bd-7710449.pdf?src-supplier=Element14, ComponentLink3Description=https://datasheet.ciiva.com/928/si4816bd-928458.pdf?src-supplier=Digi-Key, ComponentLink3URL=https://datasheet.ciiva.com/928/si4816bd-928458.pdf?src-supplier=Digi-Key, ComponentLink4Description=https://datasheet.ciiva.com/928/si4816bd-928459.pdf?src-supplier=Digi-Key, ComponentLink4URL=https://datasheet.ciiva.com/928/si4816bd-928459.pdf?src-supplier=Digi-Key, ComponentLink5Description=https://datasheet.ciiva.com/928/si4816bd-928460.pdf?src-supplier=Digi-Key, ComponentLink5URL=https://datasheet.ciiva.com/928/si4816bd-928460.pdf?src-supplier=Digi-Key, ComponentLink6Description=https://datasheet.ciiva.com/11161/si4816bd-11161496.pdf?src-supplier=Avnet, ComponentLink6URL=https://datasheet.ciiva.com/11161/si4816bd-11161496.pdf?src-supplier=Avnet, ComponentLink7Description=https://datasheet.ciiva.com/16486/si4816bd-16486349.pdf?src-supplier=Future+Electronics, ComponentLink7URL=https://datasheet.ciiva.com/16486/si4816bd-16486349.pdf?src-supplier=Future+Electronics, ComponentLink8Description=https://datasheet.ciiva.com/18448/70026226-18448822.pdf?src-supplier=Allied+Electronics, ComponentLink8URL=https://datasheet.ciiva.com/18448/70026226-18448822.pdf?src-supplier=Allied+Electronics, Manufacturer Part Number=SI4816BDY-T1-E3, Pricing="1=1,58, 10=1,419, 100=1,1402, 500=0,93678, 1000=0,77618 (USD)", RoHS=Yes, Supplier=Digi-Key
R1 R2 R13 R15: library part AC0805JR-070RL, "Fixed Resistor, Metal Glaze/thick Film, 0.125W, 0ohm, Surface Mount, 0805", Case Code (Metric)=2012, Case Code (Imperial)=0805, Manufacturer=Yageo, Max Operating Temperature=155°C, Max Power Dissipation=125mW, Min Operating Temperature=-55°C, Supplier Part Number=YAG3755CT-ND, Temperature Coefficient=200ppm/°C, Tolerance=5%, Voltage Rating=150V, Case/Package=0805, Category="Chip SMD Resistors", ComponentLink1Description=https://datasheet.octopart.com/AC0805JR-070RL-Yageo-datasheet-166720450.pdf?src-supplier=Future+Electronics, ComponentLink1URL=https://datasheet.octopart.com/AC0805JR-070RL-Yageo-datasheet-166720450.pdf?src-supplier=Future+Electronics, ComponentLink2Description=http://www.yageo.com/documents/recent/PYu-AC_51_RoHS_L_2.pdf?src-supplier=Mouser, ComponentLink2URL=http://www.yageo.com/documents/recent/PYu-AC_51_RoHS_L_2.pdf?src-supplier=Mouser, Features="Moisture Resistant,Automotive AEC-Q200", Height=0.024inch, Lead Free="Lead Free", Length=0.079inch, Manufacturer Part Number=AC0805JR-070RL, Number of Terminations=2, Packaging="Tape and Reel", Power Rating=125mW, Pricing="1=0,1, 10=0,037, 25=0,0272, 50=0,0206, 100=0,0152, 250=0,0116, 500=0,00928, 1000=0,00683 (USD)", RoHS=Yes, RoHS Compliant=Yes, Series=AC, Stock=181915, Supplier=Digi-Key, Termination=SMD/SMT, Width=1.25mm
R3: library part AC0805FR-0710RL, "Res Thick Film 0805 10 Ohm 1% 0.125W(1/8W) ±200ppm/C Pad SMD Automotive T/R", Manufacturer=Yageo, Supplier Part Number=YAG3690CT-ND, Category="Chip SMD Resistors", ComponentLink1Description=http://www.mouser.com/ds/2/447/yageodocoutput-1111992.pdf?src-supplier=Mouser, ComponentLink1URL=http://www.mouser.com/ds/2/447/yageodocoutput-1111992.pdf?src-supplier=Mouser, ComponentLink2Description=http://www.yageo.com/NewPortal/yageodocoutput?fileName=/pdf/R-Chip/PYu-AC_51_RoHS_L_6.pdf&src-supplier=Digi-Key, ComponentLink2URL=http://www.yageo.com/NewPortal/yageodocoutput?fileName=/pdf/R-Chip/PYu-AC_51_RoHS_L_6.pdf&src-supplier=Digi-Key, ComponentLink3Description=https://www.yageo.com/upload/media/product/productsearch/datasheet/rchip/PYu-AC_51_RoHS_L_7.pdf?src-supplier=Digi-Key, ComponentLink3URL=https://www.yageo.com/upload/media/product/productsearch/datasheet/rchip/PYu-AC_51_RoHS_L_7.pdf?src-supplier=Digi-Key, Manufacturer Part Number=AC0805FR-0710RL, Pricing="1=0,1, 10=0,049, 50=0,032, 100=0,0272, 500=0,01914, 1000=0,01668 (USD)", RoHS=Yes, Stock=256584, Supplier=Digi-Key
R4 R5: library part AC0805FR-071RL, "Res Thick Film 0805 1 Ohm 1% 0.125W(1/8W) ±200ppm/C Pad SMD Automotive T/R", Manufacturer=Yageo, Supplier Part Number=YAG3705CT-ND, Category="Chip SMD Resistors", ComponentLink1Description=https://datasheet.ciiva.com/12576/pyu-ac-51-rohs-l-2-12576553.pdf?src-supplier=Mouser, ComponentLink1URL=https://datasheet.ciiva.com/12576/pyu-ac-51-rohs-l-2-12576553.pdf?src-supplier=Mouser, Manufacturer Part Number=AC0805FR-071RL, Pricing="1=0,1, 10=0,049, 50=0,032, 100=0,0272, 500=0,01914, 1000=0,01668 (USD)", RoHS=Yes, Stock=82542, Supplier=Digi-Key
R6 R7 R9 R10: library part AC0805FR-07200KL, "Res Thick Film 0805 200K Ohm 1% 0.125W(1/8W) ±100ppm/C Pad SMD Automotive T/R", Manufacturer=Yageo, Supplier Part Number=YAG3706CT-ND, Category="Chip SMD Resistors", ComponentLink1Description=http://www.mouser.com/ds/2/447/yageodocoutput-1111992.pdf?src-supplier=Mouser, ComponentLink1URL=http://www.mouser.com/ds/2/447/yageodocoutput-1111992.pdf?src-supplier=Mouser, ComponentLink2Description=http://www.yageo.com/NewPortal/yageodocoutput?fileName=/pdf/R-Chip/PYu-AC_51_RoHS_L_6.pdf&src-supplier=Digi-Key, ComponentLink2URL=http://www.yageo.com/NewPortal/yageodocoutput?fileName=/pdf/R-Chip/PYu-AC_51_RoHS_L_6.pdf&src-supplier=Digi-Key, ComponentLink3Description=http://www.yageo.com/documents/recent/PYu-AC_51_RoHS_L_2.pdf?src-supplier=Future+Electronics, ComponentLink3URL=http://www.yageo.com/documents/recent/PYu-AC_51_RoHS_L_2.pdf?src-supplier=Future+Electronics, ComponentLink4Description=https://datasheet.octopart.com/AC0805FR-07200KL-Yageo-datasheet-151884373.pdf?src-supplier=Future+Electronics, ComponentLink4URL=https://datasheet.octopart.com/AC0805FR-07200KL-Yageo-datasheet-151884373.pdf?src-supplier=Future+Electronics, Manufacturer Part Number=AC0805FR-07200KL, Pricing="1=0,1, 10=0,029, 50=0,0188, 100=0,0158, 500=0,01096, 1000=0,00948 (USD)", RoHS=Yes, Stock=10502, Supplier=Digi-Key
R8 R11: library part AC0805FR-0710KL, "Res Thick Film 0805 10K Ohm 1% 0.125W(1/8W) ±100ppm/C Pad SMD Automotive T/R", Manufacturer=Yageo, Supplier Part Number=311-10KLGCT-ND, Category="Chip SMD Resistors", ComponentLink1Description=https://datasheet.ciiva.com/5558/pyu-ac-51-rohs-l-2-5558347.pdf?src-supplier=Mouser, ComponentLink1URL=https://datasheet.ciiva.com/5558/pyu-ac-51-rohs-l-2-5558347.pdf?src-supplier=Mouser, Manufacturer Part Number=AC0805FR-0710KL, Pricing="1=0,1, 10=0,029, 50=0,0188, 100=0,0158, 500=0,01096, 1000=0,00948 (USD)", RoHS=Yes, Stock=575627, Supplier=Digi-Key
R12 R14 R16 R17 R18: library part RES
U1: "Soft Sw PWM Cntrlr 2-OUT Power Supply Controller 200KHz/300KHz/400KHz/500KHz 32-Pin QFN EP", Manufacturer=Renesas, Supplier Part Number=ISL6236AIRZ-ND, ComponentLink1Description=https://datasheet.octopart.com/ISL6236AIRZ-Renesas-datasheet-138160199.pdf?src-supplier=Future+Electronics, ComponentLink1URL=https://datasheet.octopart.com/ISL6236AIRZ-Renesas-datasheet-138160199.pdf?src-supplier=Future+Electronics, ComponentLink2Description=http://www.intersil.com/content/dam/Intersil/documents/isl6/isl6236a.pdf?src-supplier=Digi-Key, ComponentLink2URL=http://www.intersil.com/content/dam/Intersil/documents/isl6/isl6236a.pdf?src-supplier=Digi-Key, Manufacturer Part Number=ISL6236AIRZ, Pricing="1=6,69, 10=6,039, 25=5,7584, 100=5, 250=4,77528, 500=4,4255 (USD)", RoHS=Yes, Stock=723, Supplier=Digi-Key

## Via types
v1: diameter 0.6, hole 0.3, L1 to L6, tented both sides, 102 vias

## Nets (pads, with @x,y where several pads share a name; then routed paths per layer and width w, separated by ;. In a path a pad name is that pad's centre, name@x,y a point inside that pad or via, vN(x,y) a via of type N, cw(c..) or ccw(c..) an arc to the next point about the centre after c; other vN are vias at no path point)
+1V5: C9.1 C10.1 J3.1 J4.1 L1.1 L2.2 R12.2 U1.10 U1.30 | length 45.2
  L3 w0.2: v1(25.8,28.6) 29.5,24.9 31.883,24.9 32,24.783 32,21.5 33.676,19.824 34.076,19.824 v1(34.1,19.8)
  L3 w1: v1(25.8,28.6) 25.8,29.5 32.8,36.5 v1(35.2,36.5) ; v1(34.1,19.8) 34.1,16.7 v1(37.3,13.5)
  L6 w0.2: v1@25.735,28.365 25.735,27.415 U1.30 ; U1.10 26.265,22.585 26.265,22.235 27.7,20.6 ; R12.2@32.175,19.725 R12.2@32.25,19.8
  L6 w0.5: 27.7,20.6 31.7,20.6 R12.2 ; R12.2@32.25,19.8 v1(34.1,19.8)
"+5V ,VCC": C4.1 R3.2 R8.2 R9.1 R10.2 R11.2 R13.2 R16.2 U1.2 U1.3 U1.20 | length 23.5
  L3 w0.2: v1@10.75,33.842 10.9,33.992 v1(10.9,34.1)
  L6 w0.2: v1(21.6,25.1) 21.7,25.1 22.05,24.75 U1.20 ; U1.3 27.415,25.765 28.265,25.765 28.7,26.2 ; U1.2 27.95,26.25 28.2,26.5 28.2,29.3 28.776,29.876 28.776,30.576 v1(28.8,30.6) ; C4.1@30,29.95 v1(30.6,31.4)
  L6 w0.35: 28.7,26.2 28.7,29.05 29.55,29.9
  L6 w0.5: v1(10.7,30.3) 11.4,29.6 R3.2@12.55,29.6 ; v1(10.75,31.8) R9.1 ; v1(10.9,34.1) 12.45,34.1 R10.2 ; v1(22.7,16.925) R11.2 ; R16.2 v1(28.2,36) ; v1(27.3,17) R13.2 ; v1(29.5,36.7) 29.5,36.673 29.8,36.373 29.8,35.6 R8.2
"+5V PVCC": C3.2 R1.1 R2.2 R3.1 U1.19 | length 18
  L6 w0.2: 14.45,26.5 R2.2@14.45,27.2 ; 19.533,26.2 19.65,26.083 ; C3.2 C3.2@20.075,25.325 ; 20.9,24.5 21.15,24.25 U1.19 U1.19@22.585,24.235
  L6 w0.5: 14.45,26.5 14.45,23.717 14.567,23.6 15.583,23.6 15.7,23.717 15.7,25.5 16.4,26.2 19.533,26.2 ; R2.2 R3.1 ; C3.2 19.65,26.083 ; C3.2@20.075,25.325 20.9,24.5
"+5V, LDO": C1.1 R1.2 U1.7 | length 26.1
  L3 w1: v1(11.2,24.8) 12.1,26.1 16.3,26.2 17.9,26.2 21.5,22.6 27,22.6 27.8,23.4 29.4,23.4
  L6 w0.2: U1.7 27.95,23.75 28.817,22.883 ; 29.45,21.9 29.45,22.25
  L6 w0.5: v1(11.2,24.8) R1.2 ; 28.817,22.883 29.45,22.25 ; C1.1@29.95,22.25 v1@29.95,23.15
  other v1: 29.9,23.4
+REF: C12.1 R14.2 U1.1 | length 9.4
  L6 w0.2: R14.2@27.25,33.3 R14.2 ; U1.1 27.6,27.85 ; 29.533,33.217 29.55,33.2
  L6 w0.5: R14.2@27.25,33.3 27.6,32.95 27.6,27.85 ; R14.2 28.609,33.6 cw(c28.609,32.293) 29.533,33.217
+VIN: C2.1 C5.2 C6.2 J1.1 Q1.8 Q2.8 R2.1 U1.6 | length 7.7
  L6 w0.2: v1(10.55,28.85) 10.55,28.007 11.382,27.175 R2.1@12.625,27.175 ; U1.6@27.415,24.265 U1.6 28.45,24.25 28.5,24.2 ; C2.1@30.3,24.85 30.3,25.483 30.417,25.6 v1(31.1,25.6)
  L6 w0.5: 28.5,24.2 29.85,24.2 30.05,24.4 C2.1
+VREF3: C11.1 R15.2 U1.5 | length 25.1
  L6 w0.2: R15.2@27.35,38.2 R15.2 27.25,38 R15.2@27.5,37.75 ; U1.5 28.65,24.75 29.867,25.967 29.867,26.717 C11.1
  L6 w0.7: R15.2@27.549,37.85 31.599,37.85 34.3,35.096 34.5,34.606 34.5,28.61 34.09,28.2 30.06,28.2 C11.1
EN1: R11.1 U1.14 | length 3.7
  L6 w0.2: R11.1 23,19.7 24.25,20.95 U1.14
"EN LDO": R8.1 U1.4 | length 17
  L6 w0.2: U1.4 27.415,25.235 28.475,25.235 28.532,25.285 29.237,25.91 29.241,25.914 29.3,25.973 29.3,28.783 29.417,28.9 33.583,28.9 33.7,29.017 33.7,33.783 33.641,33.841 32.533,34.95 32.05,34.95 31.8,35.2 R8.1
FB1: R12.1 R13.1 R17.2 U1.11 | length 9.3
  L6 w0.2: U1.11 25.75,22.15 26.4,21.1
  L6 w0.5: 26.4,21.1 R13.1 ; R13.1@27,19.75 R13.1 ; R12.1 31.8,17.75 30.25,19.3 30.25,19.4 29.9,19.75 R13.1
GND: C1.2 C2.2 C3.1 C4.2 C5.1 C6.1 C9.2 C10.2 C11.2 C12.2 J2.1 J5.1 J6.1 Q1.2 Q1.3 Q2.2 Q2.3 R6.2 R7.1 R17.1 R18.1 U1.8 U1.21 U1.22 U1.29 U1.33 | length 16.9
  L1 w0.2: Q1.3@10.751,14.365 Q1.3@12.173,14.365 ; Q1.2@10.751,15.635 Q1.2@12.173,15.635 ; C10.2 C10.2@37.9,30.3
  L6 w0.2: U1.21 U1.33@24.75,25.25 ; U1.22 U1.33@24.25,25.75 ; v1(23.9,26.1) U1.33@24.25,25.75 ; v1(24.5,30.2) 24.5,28.9 25.235,28.165 25.235,27.415 U1.29 ; R7.1@25,17.8 R7.1@25.025,17.825 ; U1.33 U1.33@24.75,25.25 ; U1.8@27.415,23.235 27.6,23.235 28.1,22.735 28.1,22.535 27.977,22.412 27.977,21.977 v1(27.9,21.9) ; R17.1@29.7,17.7 R17.1@29.725,17.725 ; U1.33@24.25,25.75 U1.33@24.75,25.25
  L6 w0.5: 24.7,31.4 R6.2@25.55,31.4 ; 25,17.1 R7.1@25,17.8 ; R18.1 v1(28.6,40.6) ; 29.725,17.025 R17.1@29.725,17.725
  other v1: 8,11.5 9,11.5 10,11.5 7.8,12.3 9.916,12.372 8.498,12.687 9.916,13.372 8,13.5 9.019,14.021 7.8,14.5 10.2,14.5 8.519,15.021 9.519,15.021 10.3,15.5 9.2,15.7 29.725,16.725 25,16.8 13.6,19.1 13.628,20 13.6,20.9 36.2,21.1 39.7,21.1 34.15,21.3 34.125,22.125 36.206,23.151 39.7,23.2 23.8,23.9 26,23.9 33.014,23.964 37.5,24.4 38.6,24.4 16.675,24.5 33,24.7 16.675,25.2 26,26.1 32.925,26.25 32.95,27 37.2,28 38.5,28 36.2,29.7 39.5,29.7 32.862,29.764 32.866,30.646 24.4,31.4 36.2,31.5 39.6,31.5 31.6,32 32.4,32 8.5,35.5 9.5,35.5 7.998,36.187 10,36.3 8.998,36.687 9.716,37.272 7.8,37.3 8.6,37.6 9.619,38.121 8.019,38.521 10.203,38.892 9.019,39.021 8.3,39.4 10.2,39.7 9.3,39.8 18.6,42.6 18.6,43.5 18.6,44.3
LGATE1: Q1.4 U1.18 | length 22.2
  L1 w0.5: Q1.4@12.173,13.095 13.795,13.095 v1(13.8,13.1)
  L3 w1: v1(13.8,13.1) 12.4,14.5 12.4,22.414 12.986,23 18.7,23 v1(19,23.3)
  L6 w0.2: v1(19,23.3) 19.108,23.3 19.6,23.7 22.585,23.735 U1.18
LGATE2: Q2.4 U1.23 | length 17.7
  L1 w0.2: Q2.4@12.173,37.095 v1(13.456,37.095)
  L3 w1: v1(13.456,37.095) 13.456,32.644 20,26.1 v1(21.7,26.1)
  L6 w0.2: v1(21.7,26.1) 21.808,26.1 21.958,26.25 U1.23
NetC7_2: C7.2 R4.1 | length 2.3
  L6 w0.2: C7.2 17.1,19.55 R4.1
NetC8_1: C8.1 R5.2 | length 2.3
  L6 w0.2: C8.1@17.75,29.8 17.85,29.7 R5.2
NetR4_2: R4.2 U1.17 | length 4.2
  L6 w0.2: R4.2 20.2,21.8 20.9,22.5 21.666,22.5 U1.17@22.4,23.234 ; U1.17@22.4,23.235 22.415,23.25 U1.17
NetR5_1: R5.1 U1.24 | length 3.2
  L6 w0.2: R5.1 19.85,27.4 21.314,27.4 21.949,26.765 22.585,26.765 U1.24
NetR6_1: R6.1 U1.31 | length 2.5
  L6 w0.2: R6.1@25.9,29.45 26.15,29.45 26.4,29.2 26.4,28.004 26.25,27.854 U1.31
NetR7_2: R7.2 U1.12 | length 3.3
  L6 w0.2: R7.2@24.9,19.55 R7.2@25,19.45 ; R7.2 25.5,20.3 25.5,21.7 25.25,21.95 U1.12
PHASE1: C7.1 L1.2 Q1.5 Q1.6 Q1.7 U1.16 | length 12.5
  L3 w0.2: v1@18.975,13.125 v1(19,13.1)
  L3 w1: v1@18.975,13.125 v1(18.975,17.95)
  L6 w0.2: 22.6,22.6 U1.16
  L6 w0.5: v1(18.975,17.95) 18.962,17.962 18.962,19.487 C7.1 20.283,19.5 20.4,19.617 20.4,20.4 22.129,22.129 22.6,22.6
PHASE2: C8.2 L2.1 Q2.5 Q2.6 Q2.7 U1.25 | length 12.2
  L3 w1: v1(19.2,37.1) 19.2,31.8 v1(19.8,31.2)
  L6 w0.5: v1@19.7,31.2 19.7,29.85 19.65,29.8 19.65,29.613 20,29.263 20.237,29.263 22.1,27.4 U1.25@23.15,27.4
POK1: R9.2 U1.13 U1.27 | length 34.6
  L3 w0.2: v1(21.3,30.3) 21.408,30.3 21.608,30.5 22.625,30.5 28.625,24.5 29.7,24.5 30.817,23.383 30.817,23.217 28.3,20.7 25.108,20.7 25.085,20.677 25.023,20.677 v1@25,20.7
  L6 w0.2: R9.2@14.45,31.3 15.25,32.1 20.5,32.1 21.3,31.3 v1(21.3,30.3) 21.4,30.3 23.2,28.5 23.65,28.5 24.25,27.9 U1.27 ; U1.13 24.75,21.8 24.923,21.627 24.923,20.623 v1(24.9,20.6)
POK2: R10.1 U1.28 | length 14.1
  L6 w0.2: R10.1@14.35,33.7 20.267,33.7 20.325,33.641 23.6,30.367 23.6,29.251 24.2,28.6 24.68,28.12 24.68,27.655 24.75,27.585 U1.28
REFIN2: R14.1 R15.1 R16.1 R18.2 U1.32 | length 16.7
  L6 w0.2: R14.1@25.15,33.8 R14.1
  L6 w0.35: R14.1@25.15,33.8 24.017,33.8 24.017,33.083 24.6,32.5 26.3,32.5 26.9,31.9 26.9,27.79 26.81,27.7 ; R14.1 R16.1 R15.1 R18.2
UGATE1: Q1.1 U1.15 | length 14.5
  L1 w0.2: Q1.1@12.173,16.905 Q1.1@12.176,16.903 ; v1@13.597,16.903 v1(13.6,16.9)
  L1 w0.5: Q1.1@12.176,16.903 v1@13.597,16.903
  L3 w1: v1(13.6,16.9) 14.8,16.9 18,20.1 21.3,20.1 22.6,21.4 v1(23.1,21.4)
  L6 w0.2: v1(23.1,21.4) 23.177,21.477 23.552,21.477 23.783,21.707 23.783,22.294 23.765,22.311 U1.15@23.765,22.585
UGATE2: Q2.1 U1.26 | length 25.2
  L1 w0.5: v1(10.4,40.9) 12.168,40.9 Q2.1@12.17,40.902
  L3 w1: v1@10.5,41 14,41 16.4,38.6 16.4,31.6 19.7,28.3 21.9,28.3 v1(22.2,28.6)
  L6 w0.2: v1(22.2,28.6) 22.208,28.6 22.708,28.1 23.4,28.1 23.735,27.765 23.735,27.415 U1.26
pads on no net: U1.9

## Polygon pours and split planes (outlines as drawn)
+1V5 on L1 "+1V5_L01_P004" (solid, pour order 4): 30.5,16.2 30.6,16.2 36.1,16.2 36.1,19 36.2,19.1 42.4,19.1 45.4,16.1 47.3,16.1 47.3,11.4 34.9,11.4 34.9,9.6 34.5,9.3 34.4,9.3 29.9,9.3 29.9,16.2
+VIN on L1 "+VIN_L01_P016" (solid, pour order 16): 7,25.8 12.308,25.8 16,21.436 16,19.8 16,16.45 19.819,16.45 19.796,23.622 15.5,27.6 15.5,29.199 27.873,29.199 28,29.3 28,22.7 32,22.7 32,29.3 28.797,32.503 6.636,32.503 6.5,42.3 12.5,42.3 13.438,42.287 14.046,41.902 14.426,41.3 14.5,40.3 19,40.3 19,41.3 18.5,41.8 16,41.8 16,43.3 16,45.8 4.5,45.8 2,43.3 2,25.8
GND on L1 "GND_L01_P033" (solid, pour order 33): 8,16.2 13,16.2 13,13.9 10.5,13.9 10.5,11 7.25,11 7.25,15.45
GND on L1 "GND_L01_P032" (solid, pour order 32): 8.4,40.4 13.5,40.4 13.5,37.6 10.5,37.6 10.5,35 7.75,35 7.2,35.367 7.2,39.2
GND on L1 "GND_L01_P020" (solid, pour order 20): 35.5,25.1 40.4,25.1 40.4,19.6 35.5,19.6
GND on L1 "GND_L01_P019" (solid, pour order 19): 35.5,32.4 40.4,32.4 40.4,27.4 35.5,27.4
GND on L1 "GND_L01_P018" (solid, pour order 18): 12.7,21.5 15.7,21.5 15.7,18.4 12.7,18.4
GND on L1 "GND_L01_P017" (solid, pour order 17): 16.8,45.4 16.8,42 19.3,42 19.3,45.4
+1V5 on L1 "+1V5_L01_P005" (solid, pour order 5): 30.4,40.3 30.5,40.3 34.6,40.3 34.6,38.3 47.4,38.3 47.4,33.7 47,33.7 30.1,33.7 30.1,40.3
PHASE1 on L1 "PHASE1_L01_P003" (solid, pour order 3): 15.85,16.4 24.75,16.4 24.75,9.6 19.45,9.6 15.85,12.2
PHASE2 on L1 "PHASE2_L01_P002" (solid, pour order 2): 24.65,40.1 24.65,33.775 19.873,33.775 15.975,37.058 15.975,40.1
GND on L6 "GND_L06_P042" (solid, pour order 42): 32.225,22.7 34.725,22.7 34.725,21.05 34.45,20.775 32.225,20.775
GND on L6 "GND_L06_P040" (solid, pour order 40): 31.5,25.25 31.5,23.475 33.55,23.475 33.55,25.125 33.425,25.25
GND on L6 "GND_L06_P039" (solid, pour order 39): 31.475,27.525 31.475,25.8 33.5,25.8 33.5,27.225 33.2,27.525
GND on L6 "GND_L06_P038" (solid, pour order 38): 31.2,31.3 31.2,29.25 33.3,29.25 33.3,30.9 32.9,31.3
GND on L6 "GND_L06_P031" (solid, pour order 31): 16.175,24.1 16.175,25.7 18.4,25.7 18.4,24.1
GND on L6 "GND_L06_P024" (solid, pour order 24): 31.1,34 31.1,31.5 33,31.5 33,33.6 32.6,34
"+5V ,VCC" on L4 "+5V_,VCC_L04_P034" (solid, pour order 34): 6.9,45.2 42.5,45.2 42.5,10 6.9,10
GND on L2 (split plane): 49.49,0.51 0.51,0.51 0.51,49.49 49.49,49.49
GND on L5 (split plane): 49.49,0.51 0.51,0.51 0.51,49.49 49.49,49.49

## Other copper
L1:
  text "Melike Karabayir" at 2.329,2.687 h1.52

## Silkscreen, mask and mechanical layers (free items; w line width, h text height)
Top Overlay:
  text "+OUT2" at 41.654,38.504 h1.52
  text "+VIN" at 1.629,31.254 h1.52
  text "GND" at 43.186,26.25 h1.52
  text "GND" at 43.086,22.55 h1.52
  text "GND" at 2.554,16.054 h1.52
  text "+OUT1" at 41.754,9.254 h1.52
Bottom Overlay:
  text "ISL6236A DEMO V1I1" at 40.65,44.35 h2
  text "1" at 28.3,26.4 h0.9
Top Solder:
  text "Melike Karabayir" at 2.375,2.733 h1.52
Board Outline:
  lines w0.5: 0,0 50,0 50,49.75 50,50 0,50 0,0

## Text inside footprints (layer, text, board x,y; h text height)
Q1: Top Overlay "1" at 11.1,17.8 h0.9 r270
Q2: Top Overlay "1" at 11.1,41.8 h0.9 r270